# Altium PCB PL2812B.PcbDoc
Units mm, origin at the board's own origin, x right, y up, seen from the top; angles counter-clockwise.
Board outline 5.2 x 5.2 mm, 4 copper layers (L 01 (Top), L 02 GND, L 03 PWR, L 04 (Bot)), stack 0.431 mm thick; 6 components, 4 nets, 32 pads, 0 vias.
Unrouted connection lines stored in the file: 8.
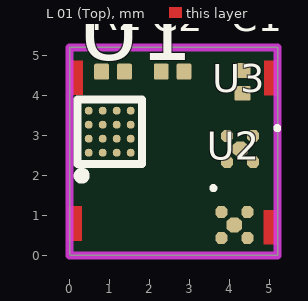
[diagram p0: L 01 (Top) view]
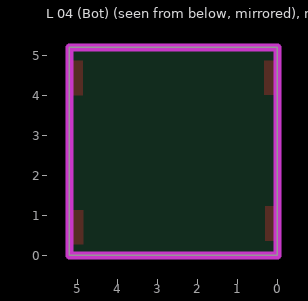
[diagram p1: L 04 (Bot) view, seen from below]

## Layer stack, top to bottom
Top Solder: solder mask 0.0102, Solder Resist, Dk 3.5
L 01 (Top): signal copper 0.054
Dielectric1: core 0.063, FR-4, Dk 4.2
L 02 GND: signal copper 0.035
Dielectric2: prepreg 0.127, FR-4, Dk 4.2
L 03 PWR: signal copper 0.035
Dielectric5: core 0.063, FR-4, Dk 4.2
L 04 (Bot): signal copper 0.054
Bottom Solder: solder mask 0.0102, Solder Resist, Dk 3.5

## Board outline
0,0 5.199,0 5.199,5.198 0,5.198

## Design rules (kind name [scope] priority, off if disabled: settings)
Clearance Clearance_DiffPair [(InDifferentialPairClass('All Differential Pairs')) vs (InPolygon)] p1: gap=0.4
Clearance Clearance_PolyToPoly [InPoly vs InPoly] p2: gap=0.3
Clearance Clearance_Polygon [(InPolygon)] p3: gap=0.15
Clearance [All] p4: gap=0.05
ComponentClearance ComponentClearance_logo [(HasFootprint('LOGO PRINT') or HasFootprint('FIDU-DOT - small'))] p1: gap=-0.05 collisioncheckmode=3 verticalgap=-0.1 showdistances=FALSE
ComponentClearance [All] p2: gap=-0.05 collisioncheckmode=3 verticalgap=0.254 showdistances=FALSE
DiffPairsRouting [All] p1: maxlimit=1 minlimit=0.11 mostfreqgap=1 toplayer_maxgap=0.145 toplayer_prefgap=0.145 toplayer_minwidth=0.11 toplayer_maxwidth=0.381 toplayer_prefwidth=0.381 midlayer1_minwidth=0.11 midlayer1_maxwidth=0.381 midlayer1_prefwidth=0.381 midlayer6_maxgap=0.191 midlayer6_prefgap=0.19 midlayer6_minwidth=0.11 midlayer6_maxwidth=0.381 midlayer6_prefwidth=0.381 bottomlayer_maxgap=0.145 bottomlayer_prefgap=0.145 bottomlayer_minwidth=0.11 bottomlayer_maxwidth=0.381 bottomlayer_prefwidth=0.381 maxuncoupledlength=47.5
FabricationTestPointUsage TestPointUsage [All] p1: valid=0 allowmultiple=FALSE
FabricationTestpoint Testpoint [All] p1: side=3 testpointundercomponent=TRUE minsize=1.016 maxsize=2.54 preferedsize=1.524 minholesize=0 maxholesize=1.016 preferedholesize=0.813 testpointgrid=0.025 allowsidetop=TRUE allowsidebottom=TRUE usegrid=TRUE gridtolerance=0
HoleSize [All] p1: absolutevalues=TRUE maxlimit=5 minlimit=0.15 maxpercent=80.000 minpercent=20.000
MinimumAnnularRing [All] p1: minimumring=0.074
PlaneClearance [All] p1: clearance=0.4
PlaneConnect [All] p1: planeconnectstyle=Direct reliefexpansion=0.508 reliefentries=4 reliefconductorwidth=0.254 reliefairgap=0.254
PolygonConnect PolygonConnect_5 [InPadClass('pad') or IsVia] p1: connectstyle=Direct reliefconductorwidth=0.254 reliefentries=4 polygonreliefangle="90 Angle" airgapwidth=0.254
PolygonConnect PolygonConnect_4 [HasFootprint('MHole3_2mm')] p2: connectstyle=Direct reliefconductorwidth=0.254 reliefentries=4 polygonreliefangle="90 Angle" airgapwidth=0.254
PolygonConnect PolygonConnect_3 [(InComponentClass('All Components'))] p3: connectstyle=Relief reliefconductorwidth=0.15 reliefentries=4 polygonreliefangle="90 Angle" airgapwidth=0.2
RoutingCorners [All] p1: cornerstyle=Round minsetback=2 maxsetback=2
RoutingVias [All] p1: holewidth=0.3 width=0.6 viastyle="Through Hole" minholewidth=0.15 minwidth=0.3 maxholewidth=1 maxwidth=3
SMDNeckDown [All] p1: percent=80.000
SilkToSilkClearance [All] p1: silktosilkclearance=0.1
SilkToSolderMaskClearance SilkscreenOverComponentPads [IsPad] p1: minsilkscreentomaskgap=0.1 clearancetoexposedcopper=TRUE
SolderMaskExpansion SolderMaskExpansion_VIA [(IsVia)] p1: expansion=-0.125
SolderMaskExpansion [All] p2: expansion=0
UnpouredPolygon [All] p1: allowunpoured=FALSE
Width [All] p1: maxlimit=3 minlimit=0.05 preferedwidth=0.2 toplayer_prefwidth=0.08 midlayer1_minwidth=0.11 midlayer6_minwidth=0.11 bottomlayer_minwidth=0.1 bottomlayer_prefwidth=0.1 minimp=50.000000 maximp=50.000000 favimp=50.000000 checkconnectedcopper=TRUE
19 further rules are at their usual default settings.

## Components (designator, comment, footprint, x,y, rotation, side; value= is the part's Value field where it differs from the comment)
C1 "470nF" CAPC0603X33N 4.323,4.337 r270 top
C2 "470nF" CAPC0603X33N 2.574,4.595 r180 top
R2 "10K" RESC0603X26N 1.084,4.592 r180 top
U1 "ICE40UL1K-SWG16ITR" BGA16C35P4X4_140X140X49B21N 1.002,3.091 r90 top
U2 "LDO_1mm" DFN65P100X45-4N 4.117,0.757 r0 top
U3 "LDO_1mm" DFN65P100X45-4N 4.265,2.657 r270 top

## Footprints (in the part's own frame and the unit in brackets; to place one, negate y for a bottom-side part, rotate by r counter-clockwise, add the part's x,y. Pads: shape width x height; smd on the part's side, far side on the other; paste and mask are expansions set on the pad)
BGA16C35P4X4_140X140X49B21N [mm]
  round 0.2 smd: A1(-0.525,0.525) A2(-0.175,0.525) A3(0.175,0.525) A4(0.525,0.525) B1(-0.525,0.175) B2(-0.175,0.175) B3(0.175,0.175) B4(0.525,0.175) C1(-0.525,-0.175) C2(-0.175,-0.175) C3(0.175,-0.175) C4(0.525,-0.175) D1(-0.525,-0.525) D2(-0.175,-0.525) D3(0.175,-0.525) D4(0.525,-0.525)
  silkscreen extent -1.2,-0.81 0.81,0.81, body extent -0.7,-0.7 0.7,0.7, height 0.5
CAPC0603X33N [mm]
  rrect20% 0.37x0.4 smd: 1(-0.285,0) 2(0.285,0)
  body extent -0.3,-0.15 0.3,0.15, height 0.29
DFN65P100X45-4N [mm] "DFN, 4-Leads, Body 1.00x1.00mm, Pitch 0.65mm, IPC Medium Density"
  oct 0.3x0.3 smd: 1(-0.325,0.325) 2(-0.325,-0.325) 3(0.325,-0.325) 4(0.325,0.325)
  oct 0.38x0.38 smd: 5(0,0)
  silkscreen extent -0.57,0.88 -0.48,0.97, body extent -0.53,-0.53 0.53,0.53, height 0.45
RESC0603X26N [mm]
  rrect20% 0.37x0.4 smd: 1(-0.285,0) 2(0.285,0)
  body extent -0.34,-0.16 0.34,0.17, height 0.34

## Part data
C1 C2: library part 24921, "KON 470nF X5R 6.3V SMD 20%"
R2: library part 24914, "WID SMD 10K 1% 0,05W"
U1: library part 26737

## Nets (pads, with @x,y where several pads share a name; then routed paths per layer and width w, separated by ;. In a path a pad name is that pad's centre, name@x,y a point inside that pad or via, vN(x,y) a via of type N, cw(c..) or ccw(c..) an arc to the next point about the centre after c; other vN are vias at no path point)
CRESETB: R2.2
GND: U2.2 U2.5 U3.2 U3.5
VCC: U2.1
VIN: R2.1 U2.3 U2.4 U3.3 U3.4
pads on no net: C1.1 C1.2 C2.1 C2.2 U1.A1 U1.A2 U1.A3 U1.A4 U1.B1 U1.B2 U1.B3 U1.B4 U1.C1 U1.C2 U1.C3 U1.C4 U1.D1 U1.D2 U1.D3 U1.D4 U3.1

## Keep-outs
Keep-Out Layer:
  the board outline again, w0.2

## Other copper
L 01 (Top):
  rectangle net VIN: 4.851,0.271 5.192,1.138
  rectangle: 4.859,4.001 5.2,4.868
  rectangle: -0.032,0.363 0.309,1.23
  rectangle: -0.009,4.008 0.332,4.875

## Silkscreen, mask and mechanical layers (free items; w line width, h text height)
Mechanical 6:
  the board outline again, w0.01

## Dimensions
0,0 to 0,5.198 on Dimension
0,5.198 to 5.199,5.198 on Dimension